# Altium PCB PCB_monitoring_Top_Front (2).PcbDoc
Units mm, origin at the board's own origin, x right, y up, seen from the top; angles counter-clockwise.
Board outline 113 x 32 mm, 2 copper layers (Top Layer, Bottom Layer), stack 1.571 mm thick; 48 components, 234 nets, 161 pads, 0 vias.
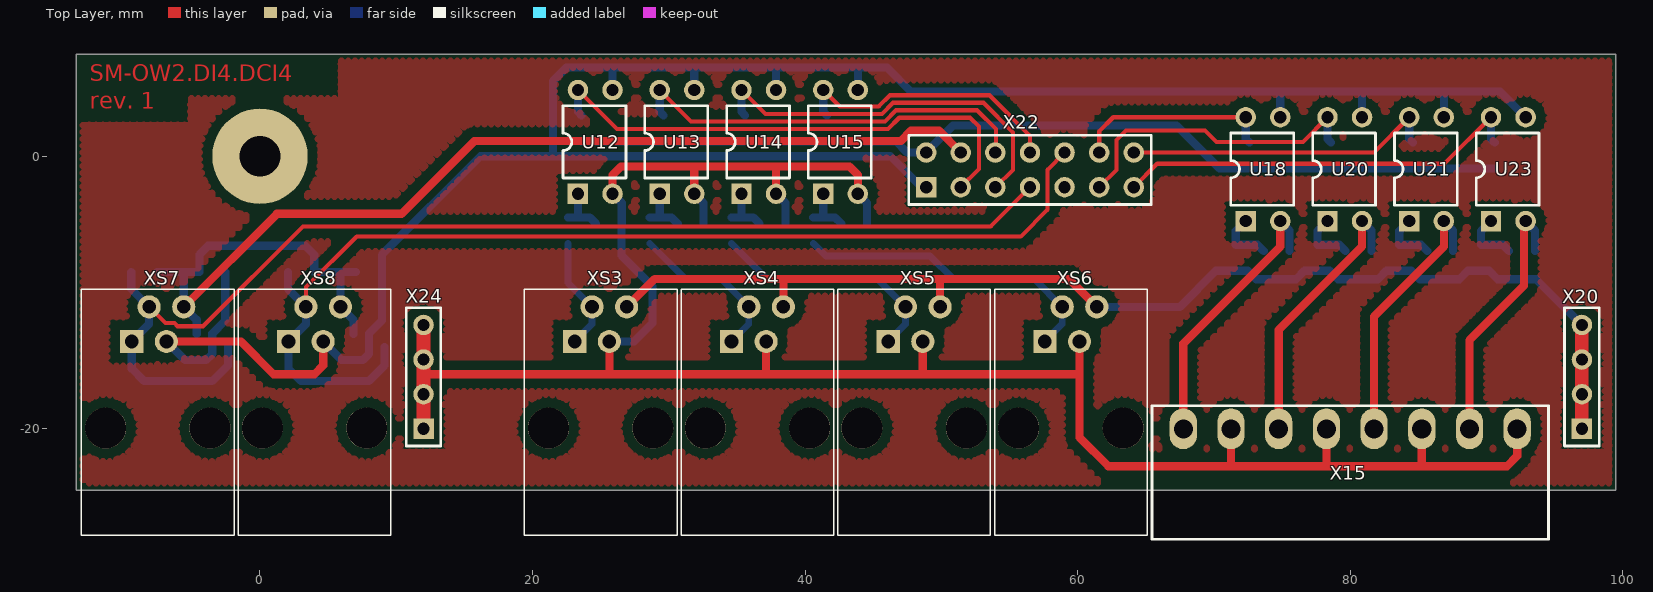
[diagram p0: Top Layer view]
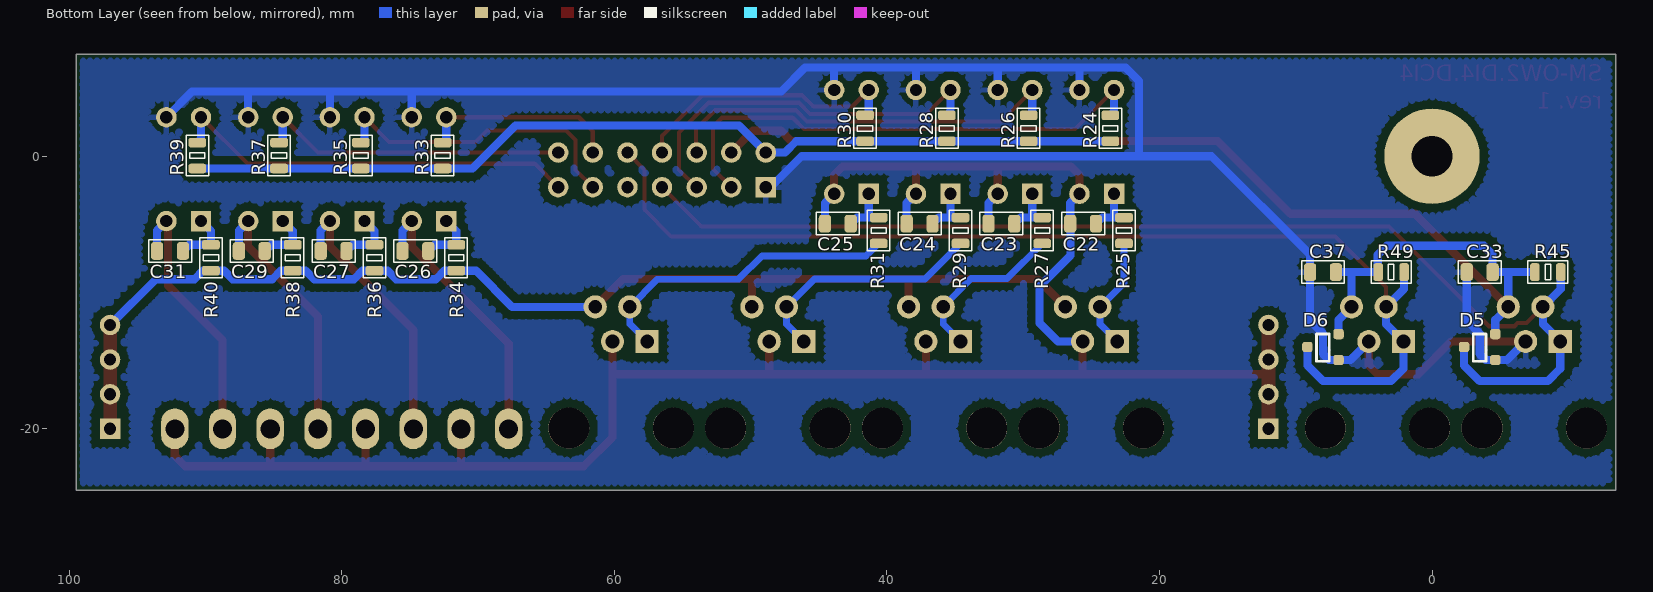
[diagram p1: Bottom Layer view, seen from below]

## Layer stack, top to bottom
Top Solder: solder mask 0.0102, Solder Resist, Dk 3.5
Top Layer: signal copper 0.0356
Dielectric 1: dielectric 1.5, FR-4, Dk 4.8
Bottom Layer: signal copper 0.0356
Bottom Solder: solder mask 0.0102, Solder Resist, Dk 3.5

## Board outline
-13.5,-24.5 99.5,-24.5 99.5,7.5 -13.5,7.5

## Design rules (kind name [scope] priority, off if disabled: settings)
Clearance Clearance_3 [InPolygon And InNetClass('GND')] p1: gap=0.4
Clearance Clearance_2 [InPolygon And OnLayer('Bottom Layer')] p2: gap=0.6
Clearance Clearance_1 [InPolygon And OnLayer('Top Layer')] p3: gap=0.7
Clearance [All] p4: gap=0.25
ComponentClearance [All] p1: gap=0 collisioncheckmode=3 verticalgap=0 showdistances=FALSE
Height [All] p1: minheight=0 maxheight=30 prefheight=12.7
HoleSize [All] p1: absolutevalues=TRUE maxlimit=5 minlimit=0.2 maxpercent=80.000 minpercent=20.000
HoleToHoleClearance [All] p1: gap=0.25 allowstackedmicrovias=TRUE
MinimumSolderMaskSliver [All] p1: minsoldermaskwidth=0
PlaneClearance [All] p1: clearance=0.5
PlaneConnect [All] p1: planeconnectstyle=Relief reliefexpansion=0.5 reliefentries=4 reliefconductorwidth=0.3 reliefairgap=0.25
PolygonConnect [All] p1: connectstyle=Relief reliefconductorwidth=0.4 reliefentries=4 polygonreliefangle="90 Angle" airgapwidth=0.4
RoutingCorners [All] p1: cornerstyle=45-Degree minsetback=2 maxsetback=2
RoutingVias [All] p1: holewidth=0.8 width=1.3 viastyle="Through Hole" minholewidth=0.3 minwidth=0.8 maxholewidth=5 maxwidth=7
SilkToBoardRegionClearance [All] p1 off:
SilkToSilkClearance [All] p1: silktosilkclearance=0
SilkToSolderMaskClearance [IsPad] p1: minsilkscreentomaskgap=0 clearancetoexposedcopper=TRUE
SolderMaskExpansion [All] p1: expansion=0.1
Width [All] p1: maxlimit=4 minlimit=0.25 preferedwidth=0.5 minimp=50.000000 maximp=50.000000 favimp=50.000000
19 further rules are at their usual default settings.

## Components (designator, comment, footprint, x,y, rotation, side; value= is the part's Value field where it differs from the comment)
C22 "0,1uF" C_0805 25.6,-4.95 r0 bottom
C23 "0,1uF" C_0805 31.6,-4.95 r0 bottom
C24 "0,1uF" C_0805 37.6,-4.95 r0 bottom
C25 "0,1uF" C_0805 43.6,-4.95 r0 bottom
C26 "0,1uF" C_0805 74.6,-6.95 r0 bottom
C27 "0,1uF" C_0805 80.6,-6.95 r0 bottom
C29 "0,1uF" C_0805 86.6,-6.95 r0 bottom
C31 "0,1uF" C_0805 92.6,-6.95 r0 bottom
C33 "0,1uF" C_0805 -3.5,-8.5 r0 bottom
C37 "0,1uF" C_0805 8,-8.5 r0 bottom
D5 "BAT54S" SOT-23_d -3.5,-14 r0 bottom
D6 "BAT54S" SOT-23_d 8,-14 r0 bottom
R24 "Resistor" R_0805 23.6,2.05 r90 bottom
R25 "Resistor" R_0805 22.6,-5.45 r270 bottom
R26 "Resistor" R_0805 29.6,2.05 r90 bottom
R27 "Resistor" R_0805 28.6,-5.45 r270 bottom
R28 "Resistor" R_0805 35.6,2.05 r90 bottom
R29 "Resistor" R_0805 34.6,-5.45 r270 bottom
R30 "Resistor" R_0805 41.6,2.05 r90 bottom
R31 "Resistor" R_0805 40.6,-5.45 r270 bottom
R33 "Resistor" R_0805 72.6,0.05 r90 bottom
R34 "Resistor" R_0805 71.6,-7.45 r270 bottom
R35 "Resistor" R_0805 78.6,0.05 r90 bottom
R36 "Resistor" R_0805 77.6,-7.45 r270 bottom
R37 "Resistor" R_0805 84.6,0.05 r90 bottom
R38 "Resistor" R_0805 83.6,-7.45 r270 bottom
R39 "Resistor" R_0805 90.6,0.05 r90 bottom
R40 "Resistor" R_0805 89.6,-7.45 r270 bottom
R45 "Resistor" R_0805 -8.5,-8.5 r0 bottom
R49 "Resistor" R_0805 3,-8.5 r0 bottom
U12 "PC817C" DIP-4 24.6,1.05 r0 top
U13 "PC817C" DIP-4 30.6,1.05 r0 top
U14 "PC817C" DIP-4 36.6,1.05 r0 top
U15 "PC817C" DIP-4 42.6,1.05 r0 top
U18 "PC817C" DIP-4 73.6,-0.95 r0 top
U20 "PC817C" DIP-4 79.6,-0.95 r0 top
U21 "PC817C" DIP-4 85.6,-0.95 r0 top
U23 "PC817C" DIP-4 91.6,-0.95 r0 top
X15 "15EDGRC-3.5-08P" MC_3.5_8 80,-20 r0 top
X20 "ZL2029" PLS-4-3D 97,-20 r90 top
X22 "PLS2-14" PLS2-14 56.5,-1 r0 top
X24 "PLS-4" PLS-4-3D 12,-20 r90 top
XS3 "RJ-11" "RJ-11 - TJ4-4P4C" 25,-15.5 r180 top
XS4 "RJ-11" "RJ-11 - TJ4-4P4C" 36.5,-15.5 r180 top
XS5 "RJ-11" "RJ-11 - TJ4-4P4C" 48,-15.5 r180 top
XS6 "RJ-11" "RJ-11 - TJ4-4P4C" 59.5,-15.5 r180 top
XS7 "RJ-11" "RJ-11 - TJ4-4P4C" -7.5,-15.5 r180 top
XS8 "RJ-11" "RJ-11 - TJ4-4P4C" 4,-15.5 r180 top

## Footprints (in the part's own frame and the unit in brackets; to place one, negate y for a bottom-side part, rotate by r counter-clockwise, add the part's x,y. Pads: shape width x height; smd on the part's side, far side on the other; paste and mask are expansions set on the pad)
C_0805 [mm] "Ceramic Capacitors SMD"
  rrect50% 0.9x1.3 smd: 1(-0.95,0) 2(0.95,0)
  silkscreen extent -1.58,-0.82 1.58,0.82, body extent -1,-0.62 1,0.63, height 0.78
DIP-4 [mm]
  rect 1.5x1.5 hole 0.9: 1(-1.27,-3.81)
  round 1.5 hole 0.9: 2(1.27,-3.81) 3(1.27,3.81) 4(-1.27,3.81)
  silkscreen extent -2.36,-2.65 2.25,2.65, body extent -2.82,-4.03 2.73,3.98, height 4.31
MC_3.5_8 [mm]
  oval 2x3 hole 1.4: 1(-12.25,0) 2(-8.75,0) 3(-5.25,0) 4(-1.75,0) 5(1.75,0) 6(5.25,0) 7(8.75,0) 8(12.25,0)
  silkscreen extent -14.55,-8.1 14.55,1.7, body extent -14.4,-7.95 14.4,1.25, height 7.2
PLS2-14 [mm] "Connector; Header; 14 Position"
  rect 1.5x1.5 hole 0.9: 1(-7.62,-1.27)
  round 1.5 hole 0.9: 2(-5.08,-1.27) 3(-2.54,-1.27) 4(0,-1.27) 5(2.54,-1.27) 6(5.08,-1.27) 7(7.62,-1.27) 8(7.62,1.27) 9(5.08,1.27) 10(2.54,1.27) 11(0,1.27) 12(-2.54,1.27) 13(-5.08,1.27) 14(-7.62,1.27)
  silkscreen extent -8.89,-2.54 8.89,2.54, body extent -8.89,-2.54 8.89,2.54, height 8.44
PLS-4-3D [mm] "Connector; Header; 4 Position"
  rect 1.5x1.5 hole 0.9: 1(0,0)
  round 1.5 hole 0.9: 2(2.54,0) 3(5.08,0) 4(7.62,0)
  silkscreen extent -1.27,-1.27 8.89,1.27, body extent -1.27,-1.27 8.89,1.27, height 8.44
R_0805 [mm] "Resistor Pattern"
  rrect50% 0.7x1.3 smd: 1(-0.95,0) 2(0.95,0)
  silkscreen extent -1.48,-0.82 1.48,0.82, body extent -1.15,-0.67 1.15,0.68, height 0.76
"RJ-11 - TJ4-4P4C" [mm] "Telephone connector"
  round 3 hole 3 unplated: 0(-3.83,4.445) 0(3.83,4.445)
  rect 1.7x1.7 hole 1: 1(1.905,-1.905)
  round 1.7 hole 1: 2(0.635,-4.445) 3(-0.635,-1.905) 4(-1.905,-4.445)
  silkscreen extent -5.6,-5.75 5.6,12.32, body extent -5.6,-5.75 5.6,12.32, height 11
SOT-23_d [mm]
  rrect50% 0.76x0.76 smd: 1(-1.145,0.95) 2(-1.145,-0.95) 3(1.145,0)
  silkscreen extent -0.47,-0.95 0.48,1.05, body extent -1.37,-1.53 1.27,1.47, height 1.08

## Part data
C22 C23 C24 C25 C26 C27 C29 C31 C33 C37: library part Cap_Semi, "Capacitor semi"
D5 D6: "Diode Schottky"
U12 U13 U14 U15 U18 U20 U21 U23: library part PC817, "Optocoupler"
X15: library part MC_3.5_8, "Connector 3.5mm"
X20: library part PLS-4, "Header, 4-Pin"
X22: "Header, 14-Pin"
X24: "ZL2029"
XS3 XS4 XS5 XS6 XS7 XS8: "TJ4-4P4C"

## Free pads (board coordinates)
  round 7 hole 3: 0(0,0)

## Nets (pads, with @x,y where several pads share a name; then routed paths per layer and width w, separated by ;. In a path a pad name is that pad's centre, name@x,y a point inside that pad or via, vN(x,y) a via of type N, cw(c..) or ccw(c..) an arc to the next point about the centre after c; other vN are vias at no path point)
1-WIRE1: 
1-WIRE1_T: D5.3 R45.1 X22.4 XS7.1 XS7.2 | length 86.9
  Top Layer w0.3: XS7.2 -6.94,-12.25 -6.275,-12.25 -6.05,-12.475 -4.175,-12.475 3.15,-5.15 53.62,-5.15 X22.4
  Bottom Layer w0.6: R45.1 -9.45,-9.74 XS7.2 -8.135,-12.325 XS7.1 -9.405,-15.595 -8.5,-16.5 -3.5,-16.5 -2.355,-15.355 D5.3
1-WIRE2: 
1-WIRE2_T: D6.3 R49.1 X22.10 XS8.1 XS8.2 | length 80.3
  Top Layer w0.3: XS8.2 3.365,-9.61 7.1,-5.875 55.825,-5.875 57.775,-3.925 57.775,-0.995 X22.10
  Bottom Layer w0.6: R49.1 2.05,-9.74 XS8.2 3.365,-12.325 XS8.1 2.095,-15.595 3,-16.5 8,-16.5 9.145,-15.355 D6.3
1-WIRE3: 
1-WIRE3_T: X22.5
3.3V: 
3.3V_T: R24.1 R26.1 R28.1 R30.1 R33.1 R35.1 R37.1 R39.1 X22.14 | length 69.5
  Bottom Layer w0.6: R24.1 R26.1 R28.1 R30.1 46.65,1.1 47.48,0.27 X22.14 50.86,2.25 67.25,2.25 70.4,-0.9 R33.1 R39.1
5V: 
5V_BUS: 
5V_CPU: 
5V_T: C33.1 C37.1 D5.2 D6.2 R45.2 R49.2 X22.13 XS7.4 XS8.4 | length 90.7
  Top Layer w0.6: XS7.4 1.235,-4.225 10.375,-4.225 15.725,1.125 47.025,1.125 47.775,1.875 49.815,1.875 X22.13
  Bottom Layer w0.6: R45.2 -5.5,-8.5 ; D5.2 -4.645,-12.005 XS7.4 -5.595,-8.595 -5.5,-8.5 ; D6.2 6.855,-12.005 XS8.4 5.905,-8.595 6,-8.5 ; C37.1 6,-8.5 ; -5.5,-8.5 C33.1 -4.45,-7.2 -3.825,-6.575 3.325,-6.575 3.975,-7.225 3.975,-8.475 R49.2 6,-8.5
12V: 
12V_B: 
12V_EXT: 
12V_EXT_T: R34.2 R36.2 R38.2 R40.2 X20.1 X20.2 X20.3 X20.4 XS3.4 XS4.4 XS5.4 XS6.4 | length 87.9
  Top Layer w0.6: XS3.4 28.96,-9 38.4,-9 ; XS4.4 38.405,-9.005 38.4,-9 ; XS5.4 49.905,-9.02 49.925,-9 ; XS6.4 59.35,-9 49.925,-9 ; 38.4,-9 49.925,-9
  Top Layer w1: X20.1 X20.2 X20.3 X20.4
  Bottom Layer w0.6: XS6.4 67.495,-11.055 70.15,-8.4 R34.2 72.475,-8.4 73.1,-9.025 76.025,-9.025 76.65,-8.4 R36.2 78.475,-8.4 79.1,-9.025 82.025,-9.025 82.65,-8.4 84.475,-8.4 85.1,-9.025 88.025,-9.025 88.65,-8.4 90.175,-8.4 90.8,-9.025 93.645,-9.025 X20.4 ; X20.2@96.96,-17.5 X20.2
12V_IN1: 
12V_IN2: 
12V_INT: 
A: 
B: 
B_OPR1: 
B_OPR2: 
B_OPR3: 
B_OPR4: 
B_OSR1: 
B_OSR2: 
B_OSR3: 
B_OSR4: 
B_OSR5: 
B_OSR6: 
B_OSR7: 
B_OSR8: 
B_OSR9: 
B_OSR10: 
B_OSR11: 
B_OSR12: 
B_OSR13: 
B_OSR14: 
C_OPR1: 
C_OPR2: 
C_OPR3: 
C_OPR4: 
C_OSR1: 
C_OSR2: 
C_OSR3: 
C_OSR4: 
C_OSR5: 
C_OSR6: 
C_OSR7: 
C_OSR8: 
C_OSR9: 
C_OSR10: 
C_OSR11: 
C_OSR12: 
C_OSR13: 
C_OSR14: 
DCI1: C26.2 U18.2 X15.1 | length 20.7
  Top Layer w0.6: X15.1 67.75,-13.75 74.87,-6.63 U18.2
  Bottom Layer w0.6: U18.2 75.55,-5.44 C26.2
DCI2: C27.2 U20.2 X15.3 | length 20.2
  Top Layer w0.6: X15.3 74.75,-12.75 80.87,-6.63 U20.2
  Bottom Layer w0.6: U20.2 81.55,-5.44 C27.2
DCI3: C29.2 U21.2 X15.5 | length 19.8
  Top Layer w0.6: X15.5 81.75,-11.75 86.87,-6.63 U21.2
  Bottom Layer w0.6: U21.2 87.55,-5.44 C29.2
DCI4: C31.2 U23.2 X15.7 | length 19.4
  Top Layer w0.6: X15.7 88.75,-13.5 92.75,-9.5 92.75,-4.88 U23.2
  Bottom Layer w0.6: U23.2 93.55,-5.44 C31.2
DCI5: 
DCI6: 
DCI7: 
DCI8: 
DI1: 
DI2: 
DI3: 
DI4: 
DI5: R25.2 XS3.1 XS3.2 | length 8.5
  Bottom Layer w0.5: R25.2 22.6,-9.29 XS3.2 24.365,-12.325 XS3.1
DI6: R27.2 XS4.1 XS4.2 | length 12.3
  Bottom Layer w0.5: R27.2 31.175,-8.975 33.825,-8.975 35.865,-11.015 XS4.2 35.865,-12.325 XS4.1
DI7: R29.2 XS5.1 XS5.2 | length 17.8
  Bottom Layer w0.5: R29.2 37.2,-9 45.31,-9 XS5.2 47.365,-12.325 XS5.1
DI8: R31.2 XS6.1 XS6.2 | length 23.3
  Bottom Layer w0.5: R31.2 41.525,-7.325 49.175,-7.325 50.875,-9.025 56.835,-9.025 XS6.2 58.865,-12.325 XS6.1
FA: 
FB\: 
FY: 
FZ\: 
GND: 
GND_B: 
GND_BUS: 
GND_EXT: 
GND_EXT_T: C22.2 C23.2 C24.2 C25.2 U12.2 U13.2 U14.2 U15.2 X15.2 X15.4 X15.6 X15.8 X24.1 X24.2 X24.3 X24.4 XS3.3 XS4.3 XS5.3 XS6.3 | length 161
  Top Layer w0.6: 12,-16.05 12.05,-16 25.635,-16 ; XS3.3 25.635,-16 ; U12.2 25.87,-1.38 26.5,-0.75 32,-0.75 ; U13.2 31.87,-0.88 32,-0.75 ; XS4.3 37.135,-15.865 37,-16 ; U14.2 37.87,-0.88 38,-0.75 ; U15.2 43.87,-1.37 43.25,-0.75 38,-0.75 ; XS5.3 48.635,-15.865 48.5,-16 ; XS6.3 60.135,-16 ; X15.2 71.25,-22.75 ; X15.4 78.25,-22.75 ; X15.6 85.25,-22.75 ; X15.8 92.25,-22 91.5,-22.75 85.25,-22.75 ; 25.635,-16 37,-16 ; 32,-0.75 38,-0.75 ; 37,-16 48.5,-16 ; 48.5,-16 60.135,-16 ; 60.135,-16 60.135,-20.635 62.25,-22.75 71.25,-22.75 ; 71.25,-22.75 78.25,-22.75 ; 78.25,-22.75 85.25,-22.75
  Top Layer w1: X24.1 X24.2 12,-16.05 X24.3 X24.4
  Bottom Layer w0.6: XS3.3 27.455,-13.595 28.8,-12.25 28.8,-9.55 26.525,-7.275 26.525,-4.975 C22.2 26.55,-3.44 U12.2 ; U13.2 32.55,-3.44 C23.2 ; U14.2 38.55,-3.44 C24.2 ; U15.2 44.55,-3.44 C25.2
GND_OD: 
GND_T: C33.2 C37.2 D5.1 D6.1 U12.3 U13.3 U14.3 U15.3 U18.3 U20.3 U21.3 U23.3 X22.1 XS7.3 XS8.3 | length 171.9
  Top Layer w0.6: XS7.3 -1.405,-13.595 1,-16 4,-16 4.635,-15.365 XS8.3
  Bottom Layer w0.6: XS7.3 -5.51,-14.95 D5.1 -3.95,-14.95 -3.5,-14.5 -3.5,-13 -2.55,-12.05 C33.2 ; XS8.3 5.99,-14.95 D6.1 7.55,-14.95 8,-14.5 8,-13 8.95,-12.05 C37.2 8.95,-7.225 16.175,0 21.5,0 ; U12.3 25.87,6.5 ; U13.3 31.87,6.37 32,6.5 ; U14.3 37.87,6.37 38,6.5 ; U15.3 43.87,6.5 ; X22.1 48.52,-2.27 46.25,0 21.5,0 ; U18.3 74.87,4.75 ; U20.3 80.87,4.63 80.75,4.75 ; U21.3 86.87,4.62 87,4.75 ; U23.3 90.98,4.75 87,4.75 ; 21.5,0 21.5,5.525 22.475,6.5 25.87,6.5 ; 25.87,6.5 32,6.5 ; 32,6.5 38,6.5 ; 38,6.5 43.87,6.5 ; 43.87,6.5 46,6.5 47.75,4.75 74.87,4.75 ; 74.87,4.75 80.75,4.75 ; 80.75,4.75 87,4.75
IN_A1: 
IN_A2: 
IN_ADC1: 
IN_ADC2: 
IN_D1: 
IN_D2: 
IN_D3: 
IN_D4: 
IN_D5: 
IN_D5_T: R24.2 U12.4 X22.2 | length 38.2
  Top Layer w0.3: U12.4 26.19,2 46.083,2 46.908,2.825 52.1,2.825 52.75,2.175 52.75,-0.94 X22.2
  Bottom Layer w0.6: U12.4 23.33,3.27 R24.2
IN_D6: 
IN_D6_T: R26.2 U13.4 X22.12 | length 30.3
  Top Layer w0.3: U13.4 31.64,2.55 45.856,2.55 46.681,3.375 52.625,3.375 54,2 54,0.31 X22.12
  Bottom Layer w0.6: U13.4 29.33,3.27 R26.2
IN_D7: 
IN_D7_T: R28.2 U14.4 X22.3 | length 28.4
  Top Layer w0.3: U14.4 37.09,3.1 45.628,3.1 46.453,3.925 53.075,3.925 55.25,1.75 55.25,-1 53.98,-2.27 X22.3
  Bottom Layer w0.6: U14.4 35.33,3.27 R28.2
IN_D8: 
IN_D8_T: R30.2 U15.4 X22.11 | length 20.4
  Top Layer w0.3: U15.4 42.54,3.65 45.4,3.65 46.225,4.475 53.525,4.475 56.5,1.5 X22.11
  Bottom Layer w0.6: U15.4 41.33,3.27 R30.2
ISR1: 
ISR1_T: R33.2 U18.4 X22.9 | length 14.7
  Top Layer w0.3: X22.9 61.58,1.83 62.61,2.86 U18.4
  Bottom Layer w0.6: U18.4 72.33,1.27 R33.2
ISR2: 
ISR2_T: R35.2 U20.4 X22.6 | length 22.8
  Top Layer w0.3: X22.6 62.85,-1 62.85,1.2 63.55,1.9 69.35,1.9 70.2,1.05 76.52,1.05 U20.4
  Bottom Layer w0.6: U20.4 78.33,1.27 R35.2
ISR3: 
ISR3_T: R37.2 U21.4 X22.8 | length 23.3
  Top Layer w0.3: X22.8 81.74,0.27 U21.4
  Bottom Layer w0.6: U21.4 84.33,1.27 R37.2
ISR4: 
ISR4_T: R39.2 U23.4 X22.7 | length 30.3
  Top Layer w0.3: X22.7 65.84,-0.55 86.92,-0.55 U23.4
  Bottom Layer w0.6: U23.4 90.33,1.27 R39.2
ISR5: 
ISR6: 
ISR7: 
ISR8: 
LED_OD: 
NetC2_2: 
NetC3_1: 
NetC6_2: 
NetC11_1: 
NetC12_2: 
NetC13_2: 
NetC16_1: 
NetC17_1: 
NetC18_1: 
NetC19_1: 
NetC22_1: C22.1 R25.1 U12.1 | length 4
  Bottom Layer w0.6: R25.1 24.2,-4.5 C22.1 ; 23.33,-4.5 U12.1
NetC23_1: C23.1 R27.1 U13.1 | length 4
  Bottom Layer w0.6: R27.1 30.2,-4.5 C23.1 ; 29.33,-4.5 U13.1
NetC24_1: C24.1 R29.1 U14.1 | length 4
  Bottom Layer w0.6: R29.1 36.2,-4.5 C24.1 ; 35.33,-4.5 U14.1
NetC25_1: C25.1 R31.1 U15.1 | length 4
  Bottom Layer w0.6: R31.1 42.2,-4.5 C25.1 ; 41.33,-4.5 U15.1
NetC26_1: C26.1 R34.1 U18.1 | length 4.3
  Bottom Layer w0.6: U18.1 71.6,-5.49 R34.1 73.2,-6.5 C26.1
NetC27_1: C27.1 R36.1 U20.1 | length 4.3
  Bottom Layer w0.6: U20.1 77.6,-5.49 R36.1 79.2,-6.5 C27.1
NetC28_2: 
NetC29_1: C29.1 R38.1 U21.1 | length 4.3
  Bottom Layer w0.6: U21.1 83.6,-5.49 R38.1 85.2,-6.5 C29.1
NetC30_2: 
NetC31_1: C31.1 R40.1 U23.1 | length 4.3
  Bottom Layer w0.6: U23.1 89.6,-5.49 R40.1 91.2,-6.5 C31.1
NetC32_1: 
NetC34_1: 
NetC36_1: 
NetC38_1: 
NetD4_2: 
NetDS1_2: 
NetDS2_1: 
NetDS2_2: 
NetDS3_1: 
NetDS3_2: 
NetK1_1: 
NetK1_7: 
NetK2_1: 
NetK2_7: 
NetK3_1: 
NetK3_7: 
NetK4_1: 
NetK4_7: 
NetK5_1: 
NetK5_7: 
NetK6_1: 
NetK6_7: 
NetK7_1: 
NetK7_7: 
NetK8_1: 
NetK8_7: 
NetK9_1: 
NetK9_7: 
NetK10_1: 
NetK10_7: 
NetK11_1: 
NetK11_7: 
NetK12_1: 
NetK12_7: 
NetK13_1: 
NetK13_7: 
NetK14_1: 
NetK14_7: 
NetK15_3: 
NetK15_4: 
NetK15_5: 
NetK16_3: 
NetK16_4: 
NetK16_5: 
NetK17_3: 
NetK17_4: 
NetK17_5: 
NetK18_3: 
NetK18_4: 
NetK18_5: 
NetP1_2: 
NetR3_2: 
NetR52_1: 
NetR53_1: 
NetR57_2: 
NetR58_2: 
NetR60_1: 
NetU5_2: 
NetU29_1: 
NetU29_4: 
NetU31_2: 
NetU31_3: 
NetX25_1: 
NetX25_2: 
NetX25_3: 
NetX25_4: 
NetX26_1: 
NetX26_2: 
NetX26_3: 
NetX26_4: 
NetX26_5: 
NetX26_6: 
NetX26_7: 
NetX26_8: 
NRST: 
OD: 
OPR1: 
OPR2: 
OPR3: 
OPR4: 
OSR1: 
OSR2: 
OSR3: 
OSR4: 
OSR5: 
OSR6: 
OSR7: 
OSR8: 
OSR9: 
OSR10: 
OSR11: 
OSR12: 
OSR13: 
OSR14: 
SWCLK: 
SWDIO: 
USART1_DE: 
USART1_RX: 
USART1_TX: 
USART2_RX: 
USART2_TX: 
pads on no net: XS3.0 XS4.0 XS5.0 XS6.0 XS7.0 XS8.0

## Polygon pours and split planes (outlines as drawn)
GND_T on Bottom Layer "polygon_fill" (hatched 90Degree grid 0.5 track 0.5, pour order 4): -13,-24 -13,7 99,7 99,-24
no net on Top Layer "polygon_fill" (hatched 90Degree grid 0.5 track 0.5, pour order 3): -13,-24 -13,7 99,7 99,-24

## Other copper
Top Layer:
  text "SM-OW2.DI4.DCI4" at -12.5,5.5 h1.2
  text "rev. 1" at -12.5,3.5 h1.2

## Silkscreen, mask and mechanical layers (free items; w line width, h text height)
Mechanical 3:
  the board outline again, w0.2